# EAGLE board schema (EAGLE 6.5.0)
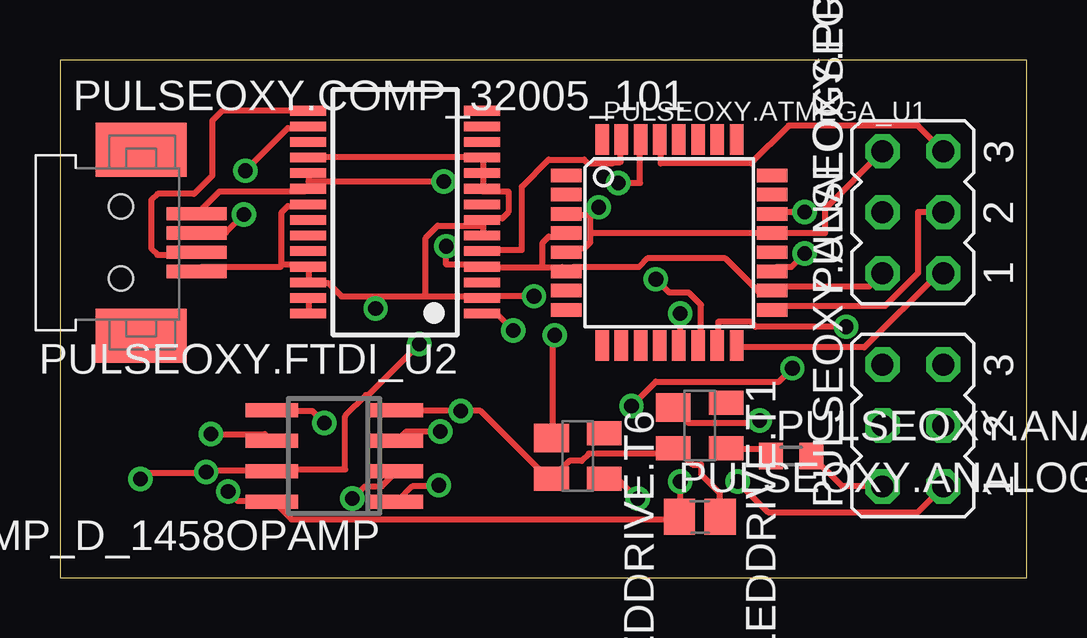
[diagram p0: board, top side]
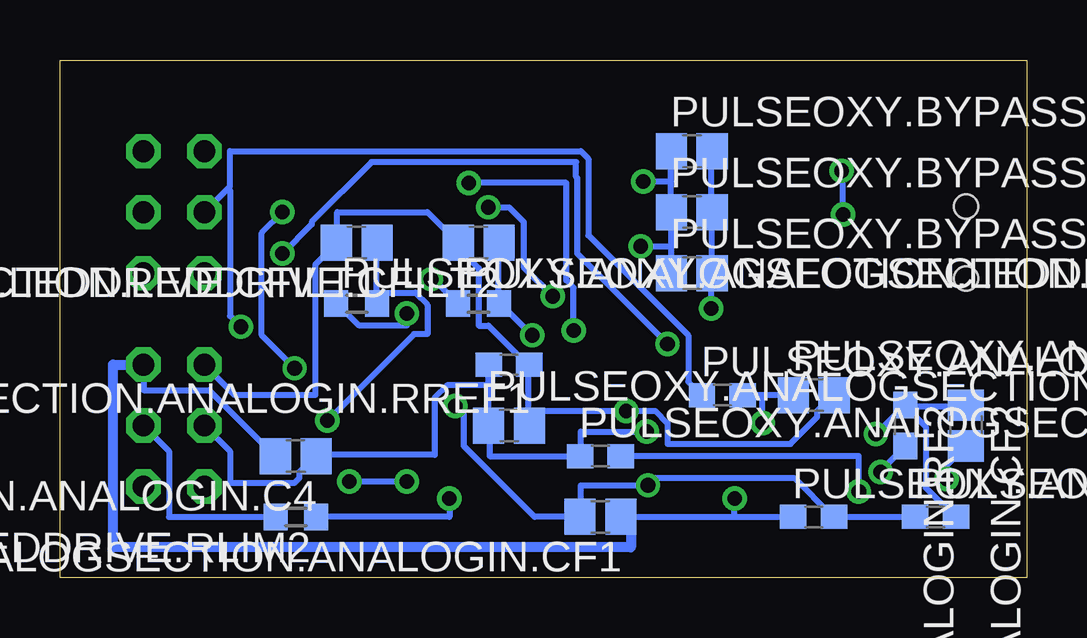
[diagram p1: board, bottom side, seen from below]

Size 40.31 x 21.58 mm. Coordinates in mm from the lower left corner, seen from the top.
Outline: 0,0 40.31,0 40.31,21.58 0,21.58 0,0
Copper layers (1*16): Top 0.035mm / dielectric 1.5mm / Bottom 0.035mm
Design rules "default": minimum track width 10mil, minimum drill 24mil, track to track 8mil, track to pad 8mil, pad to pad 8mil, via to via 8mil, smd to smd 8mil, copper to edge 40mil, drill to drill 8mil, minimum pad ring 10mil, minimum via ring 8mil, stop-mask expansion 4mil, vias tented up to drill 0mil, thermal gap 10mil

## Footprints (pad centres in the part's own frame; a part is rotated, then mirrored left to right if it is on the bottom)
C0805 = smd 1.3 x 1.5: 1 -0.85,0; 2 0.85,0
SO08 = smd 0.6 x 2.2: 1 -1.905,-2.6; 2 -0.635,-2.6; 3 0.635,-2.6; 4 1.905,-2.6; 5 1.905,2.6; 6 0.635,2.6; 7 -0.635,2.6; 8 -1.905,2.6
C0603 = smd 1.1 x 1: 1 -0.85,0; 2 0.85,0
R0603 = smd 1 x 1.1: 1 -0.85,0; 2 0.85,0
SOT143 = smd 1.2 x 1.44: 1 -0.75,-1.1 | smd 1 x 1.44: 2 0.95,-1.1; 3 0.95,1.1; 4 -0.95,1.1
JP3Q = drill 0.914 octagon: 1 -2.54,-1.27; 2 -2.54,1.27; 3 0,-1.27; 4 0,1.27; 5 2.54,-1.27; 6 2.54,1.27
TQFP32-08 = smd 1.27 x 0.559: 1 -4.293,2.8; 2 -4.293,2; 3 -4.293,1.2; 4 -4.293,0.4; 5 -4.293,-0.4; 6 -4.293,-1.2; 7 -4.293,-2; 8 -4.293,-2.8; 17 4.293,-2.8; 18 4.293,-2; 19 4.293,-1.2; 20 4.293,-0.4; 21 4.293,0.4; 22 4.293,1.2; 23 4.293,2; 24 4.293,2.8 | smd 0.559 x 1.27: 9 -2.8,-4.293; 10 -2,-4.293; 11 -1.2,-4.293; 12 -0.4,-4.293; 13 0.4,-4.293; 14 1.2,-4.293; 15 2,-4.293; 16 2.8,-4.293; 25 2.8,4.293; 26 2,4.293; 27 1.2,4.293; 28 0.4,4.293; 29 -0.4,4.293; 30 -1.2,4.293; 31 -2,4.293; 32 -2.8,4.293
32005-101 = smd 2.5 x 0.55: 1 3.15,1.2; 2 3.15,0.4; 3 3.15,-0.4; 4 3.15,-1.2 | smd 3.8 x 2.25: M1 0.85,3.875; M2 0.85,-3.875 | hole 1: 0,1.5; 0,-1.5
SSOP28 = smd 0.4 x 1.5: 1 -4.225,-3.625; 2 -3.575,-3.625; 3 -2.925,-3.625; 4 -2.275,-3.625; 5 -1.625,-3.625; 6 -0.975,-3.625; 7 -0.325,-3.625; 8 0.325,-3.625; 9 0.975,-3.625; 10 1.625,-3.625; 11 2.275,-3.625; 12 2.925,-3.625; 13 3.575,-3.625; 14 4.225,-3.625; 15 4.225,3.625; 16 3.575,3.625; 17 2.925,3.625; 18 2.275,3.625; 19 1.625,3.625; 20 0.975,3.625; 21 0.325,3.625; 22 -0.325,3.625; 23 -0.975,3.625; 24 -1.625,3.625; 25 -2.275,3.625; 26 -2.925,3.625; 27 -3.575,3.625; 28 -4.225,3.625

## Placement (x,y rotation side)
PULSEOXY.ANALOGSECTION.ANALOGIN.C2  [C0805]  8.89,7.62 0 bottom
PULSEOXY.ANALOGSECTION.ANALOGIN.C4  [C0805]  30.48,5.08 180 bottom
PULSEOXY.ANALOGSECTION.ANALOGIN.CBP1  [C0805]  26.67,2.54 0 top
PULSEOXY.ANALOGSECTION.ANALOGIN.CF1  [C0805]  17.78,2.54 180 bottom
PULSEOXY.ANALOGSECTION.ANALOGIN.CF2  [C0805]  2.54,6.35 270 bottom
PULSEOXY.ANALOGSECTION.ANALOGIN.COMP_D_1458OPAMP  LM1458D  [SO08]  11.43,5.08 90 top
PULSEOXY.ANALOGSECTION.ANALOGIN.CREF  [C0805]  21.59,6.35 0 bottom
PULSEOXY.ANALOGSECTION.ANALOGIN.R11  [C0603]  12.7,7.62 0 bottom
PULSEOXY.ANALOGSECTION.ANALOGIN.RF1  [C0603]  8.89,2.54 0 bottom
PULSEOXY.ANALOGSECTION.ANALOGIN.RF2  [C0603]  5.08,6.35 270 bottom
PULSEOXY.ANALOGSECTION.ANALOGIN.RI2  [C0603]  3.81,2.54 0 bottom
PULSEOXY.ANALOGSECTION.ANALOGIN.RREF1  [C0603]  21.59,8.89 180 bottom
PULSEOXY.ANALOGSECTION.ANALOGIN.RREF2  [C0603]  17.78,5.08 0 bottom
PULSEOXY.ANALOGSECTION.LEDDRIVE.CFILT1  [C0805]  27.94,13.97 180 bottom
PULSEOXY.ANALOGSECTION.LEDDRIVE.CFILT2  [C0805]  22.86,13.97 180 bottom
PULSEOXY.ANALOGSECTION.LEDDRIVE.RDRIVE1  [R0603]  27.94,11.43 0 bottom
PULSEOXY.ANALOGSECTION.LEDDRIVE.RDRIVE2  [R0603]  22.86,11.43 0 bottom
PULSEOXY.ANALOGSECTION.LEDDRIVE.RLIM1  [R0603]  30.48,5.08 0 top
PULSEOXY.ANALOGSECTION.LEDDRIVE.RLIM2  [R0603]  30.48,2.54 180 bottom
PULSEOXY.ANALOGSECTION.LEDDRIVE.T1  [SOT143]  26.67,6.35 270 top
PULSEOXY.ANALOGSECTION.LEDDRIVE.T6  [SOT143]  21.59,5.08 270 top
PULSEOXY.ANALOGSECTION.SENSORHEADER  [JP3Q]  35.56,6.35 90 top
PULSEOXY.ATMEGA_U1  MEGA48/88/168-AU  [TQFP32-08]  25.4,13.97 0 top
PULSEOXY.BYPASS.BP1  [C0805]  13.97,12.7 0 bottom
PULSEOXY.BYPASS.BP2  [C0805]  13.97,15.24 0 bottom
PULSEOXY.BYPASS.BP3  [C0805]  13.97,17.78 0 bottom
PULSEOXY.COMP_32005_101  MINI-USB_4P-32005-101  [32005-101]  2.54,13.97 0 top
PULSEOXY.FTDI_U2  FT232RL  [SSOP28]  13.97,15.24 90 top
PULSEOXY.PROGRPORT  [JP3Q]  35.56,15.24 90 top

## Library data of the parts
PULSEOXY.ANALOGSECTION.ANALOGIN.C2 PULSEOXY.ANALOGSECTION.ANALOGIN.C4 PULSEOXY.ANALOGSECTION.ANALOGIN.CBP1 PULSEOXY.ANALOGSECTION.ANALOGIN.CF1 PULSEOXY.ANALOGSECTION.ANALOGIN.CF2 PULSEOXY.ANALOGSECTION.ANALOGIN.CREF PULSEOXY.ANALOGSECTION.ANALOGIN.R11 PULSEOXY.ANALOGSECTION.ANALOGIN.RF1 PULSEOXY.ANALOGSECTION.ANALOGIN.RF2 PULSEOXY.ANALOGSECTION.ANALOGIN.RI2 PULSEOXY.ANALOGSECTION.ANALOGIN.RREF1 PULSEOXY.ANALOGSECTION.ANALOGIN.RREF2 PULSEOXY.ANALOGSECTION.LEDDRIVE.CFILT1 PULSEOXY.ANALOGSECTION.LEDDRIVE.CFILT2 PULSEOXY.BYPASS.BP1-PULSEOXY.BYPASS.BP3 = resistor
PULSEOXY.ANALOGSECTION.ANALOGIN.COMP_D_1458OPAMP = linear
PULSEOXY.ANALOGSECTION.LEDDRIVE.RDRIVE1 PULSEOXY.ANALOGSECTION.LEDDRIVE.RDRIVE2 PULSEOXY.ANALOGSECTION.LEDDRIVE.RLIM1 PULSEOXY.ANALOGSECTION.LEDDRIVE.RLIM2 = rcl
PULSEOXY.ANALOGSECTION.LEDDRIVE.T1 PULSEOXY.ANALOGSECTION.LEDDRIVE.T6 = semicon-smd-ipc
PULSEOXY.ANALOGSECTION.SENSORHEADER PULSEOXY.PROGRPORT = jumper
PULSEOXY.ATMEGA_U1 = avr-4
PULSEOXY.COMP_32005_101 = con-cypressindustries; OC_FARNELL: unknown; OC_NEWARK: unknown
PULSEOXY.FTDI_U2 = ftdichip; MPN: FT232RL; OC_FARNELL: 1146032; OC_NEWARK: 91K9918

## Nets
N$0: PULSEOXY.ANALOGSECTION.ANALOGIN.C2.2 PULSEOXY.ANALOGSECTION.ANALOGIN.CBP1.2 PULSEOXY.ANALOGSECTION.ANALOGIN.COMP_D_1458OPAMP.4 PULSEOXY.ANALOGSECTION.ANALOGIN.CREF.2 PULSEOXY.ANALOGSECTION.ANALOGIN.RREF1.1 PULSEOXY.ANALOGSECTION.LEDDRIVE.CFILT1.2 PULSEOXY.ANALOGSECTION.LEDDRIVE.CFILT2.2 PULSEOXY.ANALOGSECTION.LEDDRIVE.T1.2 PULSEOXY.ANALOGSECTION.LEDDRIVE.T6.2 PULSEOXY.ANALOGSECTION.SENSORHEADER.6
N$1: PULSEOXY.ANALOGSECTION.ANALOGIN.C2.1 PULSEOXY.ANALOGSECTION.ANALOGIN.COMP_D_1458OPAMP.5 PULSEOXY.ANALOGSECTION.ANALOGIN.R11.2
N$2: PULSEOXY.ANALOGSECTION.ANALOGIN.C4.2 PULSEOXY.ANALOGSECTION.ANALOGIN.CF1.1 PULSEOXY.ANALOGSECTION.ANALOGIN.COMP_D_1458OPAMP.2 PULSEOXY.ANALOGSECTION.ANALOGIN.RF1.1 PULSEOXY.ANALOGSECTION.SENSORHEADER.5
N$3: PULSEOXY.ANALOGSECTION.ANALOGIN.C4.1 PULSEOXY.ANALOGSECTION.ANALOGIN.COMP_D_1458OPAMP.3 PULSEOXY.ANALOGSECTION.ANALOGIN.CREF.1 PULSEOXY.ANALOGSECTION.ANALOGIN.RREF1.2 PULSEOXY.ANALOGSECTION.ANALOGIN.RREF2.1 PULSEOXY.ANALOGSECTION.SENSORHEADER.4
N$4: PULSEOXY.ANALOGSECTION.ANALOGIN.CBP1.1 PULSEOXY.ANALOGSECTION.ANALOGIN.COMP_D_1458OPAMP.8 PULSEOXY.ANALOGSECTION.ANALOGIN.RREF2.2 PULSEOXY.ANALOGSECTION.SENSORHEADER.1
N$5: PULSEOXY.ANALOGSECTION.ANALOGIN.CF1.2 PULSEOXY.ANALOGSECTION.ANALOGIN.COMP_D_1458OPAMP.1 PULSEOXY.ANALOGSECTION.ANALOGIN.RF1.2 PULSEOXY.ANALOGSECTION.ANALOGIN.RI2.1 PULSEOXY.ATMEGA_U1.22
N$6: PULSEOXY.ANALOGSECTION.ANALOGIN.CF2.2 PULSEOXY.ANALOGSECTION.ANALOGIN.COMP_D_1458OPAMP.7 PULSEOXY.ANALOGSECTION.ANALOGIN.RF2.2 PULSEOXY.ATMEGA_U1.19
N$7: PULSEOXY.ANALOGSECTION.ANALOGIN.CF2.1 PULSEOXY.ANALOGSECTION.ANALOGIN.COMP_D_1458OPAMP.6 PULSEOXY.ANALOGSECTION.ANALOGIN.RF2.1 PULSEOXY.ANALOGSECTION.ANALOGIN.RI2.2
N$8: PULSEOXY.ANALOGSECTION.ANALOGIN.R11.1 PULSEOXY.ATMEGA_U1.15 PULSEOXY.PROGRPORT.4
N$9: PULSEOXY.ANALOGSECTION.LEDDRIVE.CFILT1.1 PULSEOXY.ANALOGSECTION.LEDDRIVE.RDRIVE1.2 PULSEOXY.ANALOGSECTION.LEDDRIVE.T1.1
N$10: PULSEOXY.ANALOGSECTION.LEDDRIVE.CFILT2.1 PULSEOXY.ANALOGSECTION.LEDDRIVE.RDRIVE2.2 PULSEOXY.ANALOGSECTION.LEDDRIVE.T6.1
N$11: PULSEOXY.ANALOGSECTION.LEDDRIVE.RDRIVE1.1 PULSEOXY.ATMEGA_U1.13
N$12: PULSEOXY.ANALOGSECTION.LEDDRIVE.RDRIVE2.1 PULSEOXY.ATMEGA_U1.14
N$13: PULSEOXY.ANALOGSECTION.LEDDRIVE.RLIM1.2 PULSEOXY.ANALOGSECTION.SENSORHEADER.2
N$14: PULSEOXY.ANALOGSECTION.LEDDRIVE.RLIM1.1 PULSEOXY.ANALOGSECTION.LEDDRIVE.T1.3
N$15: PULSEOXY.ANALOGSECTION.LEDDRIVE.RLIM2.1 PULSEOXY.ANALOGSECTION.LEDDRIVE.T6.3
N$16: PULSEOXY.ANALOGSECTION.LEDDRIVE.RLIM2.2 PULSEOXY.ANALOGSECTION.SENSORHEADER.3
N$17: PULSEOXY.ATMEGA_U1.4 PULSEOXY.ATMEGA_U1.6 PULSEOXY.ATMEGA_U1.18 PULSEOXY.BYPASS.BP1.1 PULSEOXY.BYPASS.BP2.1 PULSEOXY.BYPASS.BP3.1 PULSEOXY.COMP_32005_101.1 PULSEOXY.FTDI_U2.4 PULSEOXY.FTDI_U2.19 PULSEOXY.FTDI_U2.20 PULSEOXY.PROGRPORT.2
N$18: PULSEOXY.ATMEGA_U1.3 PULSEOXY.ATMEGA_U1.5 PULSEOXY.ATMEGA_U1.21 PULSEOXY.BYPASS.BP1.2 PULSEOXY.BYPASS.BP2.2 PULSEOXY.BYPASS.BP3.2 PULSEOXY.COMP_32005_101.4 PULSEOXY.FTDI_U2.2 PULSEOXY.FTDI_U2.6 PULSEOXY.FTDI_U2.7 PULSEOXY.FTDI_U2.9 PULSEOXY.FTDI_U2.10 PULSEOXY.FTDI_U2.11 PULSEOXY.FTDI_U2.18 PULSEOXY.FTDI_U2.21 PULSEOXY.FTDI_U2.25 PULSEOXY.FTDI_U2.26 PULSEOXY.PROGRPORT.6
N$19: PULSEOXY.ATMEGA_U1.30 PULSEOXY.FTDI_U2.1
N$20: PULSEOXY.ATMEGA_U1.31 PULSEOXY.FTDI_U2.5
N$21: PULSEOXY.ATMEGA_U1.29 PULSEOXY.PROGRPORT.5
N$22: PULSEOXY.ATMEGA_U1.16 PULSEOXY.PROGRPORT.1
N$23: PULSEOXY.ATMEGA_U1.17 PULSEOXY.PROGRPORT.3
N$24: PULSEOXY.COMP_32005_101.3 PULSEOXY.FTDI_U2.15
N$25: PULSEOXY.COMP_32005_101.2 PULSEOXY.FTDI_U2.16
N$26: PULSEOXY.FTDI_U2.27 PULSEOXY.FTDI_U2.28

## Tracks (layer width: path | path; a pad name or v marks a point on that pad's centre or on a via)
N$0  (via drill 0.61)
  Top 0.254: PULSEOXY.ANALOGSECTION.ANALOGIN.CBP1.2 27.48,2.54 27.48,3.56 26.72,4.32 26.72,4.72 26.36,4.72 25.76,5.33 25.65,5.33 PULSEOXY.ANALOGSECTION.LEDDRIVE.T1.2 25.55,5.38 25.35,5.18 22.05,5.18 21.74,4.88 21.23,4.88 20.52,4.17 PULSEOXY.ANALOGSECTION.LEDDRIVE.T6.2 20.37,4.17 20.32,4.17 17.53,6.96 v16.71,6.96 14.07,6.96 PULSEOXY.ANALOGSECTION.ANALOGIN.COMP_D_1458OPAMP.4
  Bottom 0.254: PULSEOXY.ANALOGSECTION.ANALOGIN.C2.2 8.08,7.62 8.74,6.96 8.74,6.71 9.86,5.59 14.99,5.59 14.99,6.45 15.49,6.96 v16.71,6.96 20.68,6.96 PULSEOXY.ANALOGSECTION.ANALOGIN.CREF.2 20.78,6.35 20.78,8.89 PULSEOXY.ANALOGSECTION.ANALOGIN.RREF1.1 20.88,8.94 22.45,10.52 22.86,10.52 22.86,12.9 23.67,13.72 23.67,13.87 PULSEOXY.ANALOGSECTION.LEDDRIVE.CFILT2.2 23.72,13.97 24.99,15.24 28.75,15.24 28.75,13.97 PULSEOXY.ANALOGSECTION.LEDDRIVE.CFILT1.2 28.85,13.87 29.67,13.06 29.67,7.62 33.02,7.62 PULSEOXY.ANALOGSECTION.SENSORHEADER.6
N$1  (via drill 0.61)
  Top 0.254: v11.02,6.45 10.52,6.96 8.84,6.96 PULSEOXY.ANALOGSECTION.ANALOGIN.COMP_D_1458OPAMP.5
  Bottom 0.254: PULSEOXY.ANALOGSECTION.ANALOGIN.C2.1 11.02,7.62 | 11.02,7.62 PULSEOXY.ANALOGSECTION.ANALOGIN.R11.2 | v11.02,6.45 11.02,7.62
N$2  (via drill 0.61)
  Top 0.254: v12.19,3.3 12.7,3.81 13.41,3.81 14.02,4.42 PULSEOXY.ANALOGSECTION.ANALOGIN.COMP_D_1458OPAMP.2
  Bottom 0.254: PULSEOXY.ANALOGSECTION.SENSORHEADER.5 36.83,7.82 34.09,7.82 31.34,5.08 PULSEOXY.ANALOGSECTION.ANALOGIN.C4.2 | PULSEOXY.ANALOGSECTION.ANALOGIN.CF1.1 16.51,2.54 12.19,2.54 | 12.19,2.54 PULSEOXY.ANALOGSECTION.ANALOGIN.RF1.1 | 12.19,2.54 v12.19,3.3
  Bottom 0.406: 16.51,2.54 16.51,1.27 38.1,1.27 38.1,8.89 PULSEOXY.ANALOGSECTION.SENSORHEADER.5
N$3  (via drill 0.61)
  Top 0.254: v15.85,6.1 14.43,6.1 14.07,5.74 PULSEOXY.ANALOGSECTION.ANALOGIN.COMP_D_1458OPAMP.3
  Bottom 0.254: PULSEOXY.ANALOGSECTION.SENSORHEADER.4 33.22,5.28 33.22,3.96 30.53,3.96 30.33,4.17 30.33,4.42 29.67,5.08 PULSEOXY.ANALOGSECTION.ANALOGIN.C4.1 29.52,5.13 24.69,5.13 24.69,7.52 24.18,8.03 22.45,8.03 | 22.45,8.03 22.45,6.45 PULSEOXY.ANALOGSECTION.ANALOGIN.CREF.1 22.4,6.35 22.4,5.08 PULSEOXY.ANALOGSECTION.ANALOGIN.RREF2.1 18.59,5.18 18.59,6.1 v15.85,6.1 | 22.45,8.03 22.45,8.89 PULSEOXY.ANALOGSECTION.ANALOGIN.RREF1.2
N$4  (via drill 0.61)
  Top 0.254: v7.01,3.61 7.42,3.2 8.79,3.2 PULSEOXY.ANALOGSECTION.ANALOGIN.COMP_D_1458OPAMP.8 8.94,3.15 9.65,2.44 25.7,2.44 25.81,2.54 PULSEOXY.ANALOGSECTION.ANALOGIN.CBP1.1 25.86,2.64 v25.86,4.01 | PULSEOXY.ANALOGSECTION.SENSORHEADER.1 35.76,2.74 29.52,2.74 v28.25,4.01
  Bottom 0.254: PULSEOXY.ANALOGSECTION.ANALOGIN.RREF2.2 7.01,5.08 v7.01,3.61 | v25.86,4.01 v28.25,4.01
N$5  (via drill 0.61)
  Top 0.254: v31.04,15.24 29.77,15.24 29.72,15.19 PULSEOXY.ATMEGA_U1.22 | v30.53,8.74 29.97,8.18 24.84,8.18 v23.82,7.16 | v15.8,3.86 15.75,3.81 14.68,3.81 14.07,3.2 PULSEOXY.ANALOGSECTION.ANALOGIN.COMP_D_1458OPAMP.1
  Bottom 0.254: PULSEOXY.ANALOGSECTION.ANALOGIN.RI2.1 PULSEOXY.ANALOGSECTION.ANALOGIN.RF1.2 8.13,2.59 9.7,4.17 15.75,4.17 15.75,3.96 v15.8,3.86 18.59,3.86 18.59,2.64 PULSEOXY.ANALOGSECTION.ANALOGIN.CF1.2 20.52,2.54 23.47,5.49 23.47,6.81 v23.82,7.16 | v31.04,15.24 31.9,14.38 31.9,10.11 v30.53,8.74
N$6  (via drill 0.61)
  Top 0.254: v31.04,13.51 30.48,12.95 29.87,12.95 29.72,12.8 PULSEOXY.ATMEGA_U1.19 | v14.99,9.75 12.85,7.62 12.75,7.62 11.89,6.76 11.89,4.52 8.94,4.52 PULSEOXY.ANALOGSECTION.ANALOGIN.COMP_D_1458OPAMP.7 8.79,4.47 6.15,4.47 v6.1,4.42 5.99,4.37 3.61,4.37 v3.35,4.12
  Bottom 0.254: v6.1,4.42 6.1,4.47 5.08,5.49 PULSEOXY.ANALOGSECTION.ANALOGIN.RF2.2 | v31.04,13.51 29.82,14.73 29.82,14.83 27.33,17.32 18.8,17.32 18.8,16.71 18.75,16.66 18.75,13.51 v14.99,9.75 | v3.35,4.12 3.35,4.67 2.54,5.49 PULSEOXY.ANALOGSECTION.ANALOGIN.CF2.2
N$7  (via drill 0.61)
  Top 0.254: v6.3,5.99 8.53,5.99 8.79,5.74 PULSEOXY.ANALOGSECTION.ANALOGIN.COMP_D_1458OPAMP.6
  Bottom 0.254: PULSEOXY.ANALOGSECTION.ANALOGIN.RI2.2 3,2.54 4.22,3.76 4.22,6.3 5.08,7.16 PULSEOXY.ANALOGSECTION.ANALOGIN.RF2.1 | PULSEOXY.ANALOGSECTION.ANALOGIN.CF2.1 2.54,7.16 4.93,7.16 PULSEOXY.ANALOGSECTION.ANALOGIN.RF2.1 | v6.3,5.99 5.18,7.11 PULSEOXY.ANALOGSECTION.ANALOGIN.RF2.1
N$8  (via drill 0.61)
  Top 0.254: v32.77,10.46 29.01,10.46 28.8,10.67 27.43,10.67 27.43,9.7 PULSEOXY.ATMEGA_U1.15
  Bottom 0.254: PULSEOXY.PROGRPORT.4 33.3,16.23 | 33.3,16.23 33.22,16.31 33.22,17.78 18.59,17.78 18.29,17.47 18.29,14.28 14.12,10.11 14.12,8.18 13.56,7.62 PULSEOXY.ANALOGSECTION.ANALOGIN.R11.1 | v32.77,10.46 33.22,10.92 33.22,16.15 33.3,16.23
N$9  (via drill 0.61)
  Top 0.254: v29.16,6.55 29.06,6.45 26.21,6.45 25.6,7.06 PULSEOXY.ANALOGSECTION.LEDDRIVE.T1.1
  Bottom 0.254: PULSEOXY.ANALOGSECTION.LEDDRIVE.CFILT1.1 27.13,13.97 27.13,11.43 PULSEOXY.ANALOGSECTION.LEDDRIVE.RDRIVE1.2 27.03,11.89 25.5,11.89 24.99,11.38 24.99,10.16 25.55,10.16 v29.16,6.55
N$10  (via drill 0.61)
  Top 0.254: v20.62,10.11 20.52,10.11 20.52,5.84 PULSEOXY.ANALOGSECTION.LEDDRIVE.T6.1
  Bottom 0.254: PULSEOXY.ANALOGSECTION.LEDDRIVE.CFILT2.1 22.05,13.97 22.05,11.43 PULSEOXY.ANALOGSECTION.LEDDRIVE.RDRIVE2.2 21.89,11.38 v20.62,10.11
N$11  (via drill 0.61)
  Top 0.254: v25.86,11.02 25.86,9.7 25.81,9.7 PULSEOXY.ATMEGA_U1.13
  Bottom 0.254: v25.86,11.02 25.86,10.52 27.84,10.52 28.75,11.43 PULSEOXY.ANALOGSECTION.LEDDRIVE.RDRIVE1.1
N$12  (via drill 0.61)
  Top 0.254: v24.84,12.45 25.4,11.89 26.21,11.89 26.72,11.38 26.72,9.7 26.62,9.7 PULSEOXY.ATMEGA_U1.14
  Bottom 0.254: v24.84,12.45 24.74,12.45 23.72,11.43 PULSEOXY.ANALOGSECTION.LEDDRIVE.RDRIVE2.1
N$13
  Top 0.254: PULSEOXY.ANALOGSECTION.SENSORHEADER.2 32.61,3.81 31.34,5.08 PULSEOXY.ANALOGSECTION.LEDDRIVE.RLIM1.2
N$14
  Top 0.254: PULSEOXY.ANALOGSECTION.LEDDRIVE.RLIM1.1 29.62,5.08 29.31,5.38 27.79,5.38 PULSEOXY.ANALOGSECTION.LEDDRIVE.T1.3
N$15  (via drill 0.61)
  Top 0.254: v24.08,3.3 23.27,4.12 22.71,4.12 PULSEOXY.ANALOGSECTION.LEDDRIVE.T6.3
  Bottom 0.254: PULSEOXY.ANALOGSECTION.LEDDRIVE.RLIM2.1 24.08,2.54 v24.08,3.3
N$16
  Bottom 0.254: PULSEOXY.ANALOGSECTION.LEDDRIVE.RLIM2.2 35.76,2.54 35.76,5.28 PULSEOXY.ANALOGSECTION.SENSORHEADER.3
N$17  (via drill 0.61)
  Top 0.254: 10.36,16.51 10.36,16.82 PULSEOXY.FTDI_U2.19 | 10.36,16.51 10.36,16.26 PULSEOXY.FTDI_U2.20 10.26,16.15 10.21,16.1 6.65,16.1 5.74,15.19 PULSEOXY.COMP_32005_101.1 | 20.12,12.95 17.63,12.95 PULSEOXY.FTDI_U2.4 17.53,13.06 16.1,13.06 v16.1,13.82 | 20.12,12.95 20.93,12.95 21.08,12.8 PULSEOXY.ATMEGA_U1.6 21.23,12.8 21.39,12.95 24.13,12.95 24.49,13.31 27.74,13.31 29.11,11.94 29.57,11.94 PULSEOXY.ATMEGA_U1.18 29.72,11.99 29.87,12.14 33.73,12.14 PULSEOXY.PROGRPORT.2 | 20.12,12.95 20.12,13.97 20.37,14.22 20.98,14.22 21.08,14.33 PULSEOXY.ATMEGA_U1.4 | v16,16.51 10.36,16.51
  Bottom 0.254: 14.83,13.82 14.83,15.24 PULSEOXY.BYPASS.BP2.1 14.83,15.34 14.83,16.51 | 14.83,13.82 14.83,12.7 PULSEOXY.BYPASS.BP1.1 | 14.83,16.51 14.83,17.78 PULSEOXY.BYPASS.BP3.1 | v16.1,13.82 14.83,13.82 | 14.83,16.51 v16,16.51
N$18  (via drill 0.61)
  Top 0.254: 17.63,14.68 17.63,14.88 PULSEOXY.FTDI_U2.7 17.73,14.93 17.78,14.99 18.44,14.99 18.69,15.24 18.69,16.1 17.63,16.1 PULSEOXY.FTDI_U2.9 17.63,16.26 17.63,16.82 PULSEOXY.FTDI_U2.10 17.63,16.97 17.63,17.42 PULSEOXY.FTDI_U2.11 17.58,17.53 10.36,17.53 PULSEOXY.FTDI_U2.18 | 17.63,14.68 17.63,14.28 PULSEOXY.FTDI_U2.6 | 9.25,13.06 9.25,15.24 9.5,15.49 10.26,15.49 10.31,15.54 PULSEOXY.FTDI_U2.21 | 9.25,13.06 10.26,13.06 PULSEOXY.FTDI_U2.25 10.36,12.95 10.36,12.34 PULSEOXY.FTDI_U2.26 10.46,12.29 11.18,12.29 11.73,11.73 13.16,11.73 | 13.16,11.73 15.24,11.73 | 15.24,11.73 17.53,11.73 17.58,11.68 PULSEOXY.FTDI_U2.2 17.68,11.73 v19.76,11.73 | PULSEOXY.COMP_32005_101.4 5.74,12.8 5.89,12.95 9.2,12.95 9.25,13.06 | 13.16,11.73 v13.16,11.23 | 17.63,14.68 15.75,14.68 15.24,14.17 15.24,11.73 | 22.1,15.14 22.1,14.38 | 22.1,14.38 22.1,13.97 21.84,13.72 21.23,13.72 21.13,13.61 PULSEOXY.ATMEGA_U1.5 | 22.1,15.14 21.13,15.14 PULSEOXY.ATMEGA_U1.3 | 22.1,14.38 29.67,14.38 PULSEOXY.ATMEGA_U1.21 29.82,14.38 31.9,14.38 31.9,15.39 PULSEOXY.PROGRPORT.6 | v22.45,15.44 22.2,15.19 22.1,15.14
  Bottom 0.254: PULSEOXY.BYPASS.BP3.2 13.16,17.78 13.16,15.34 PULSEOXY.BYPASS.BP2.2 13.16,15.24 13.16,12.7 PULSEOXY.BYPASS.BP1.2 13.16,12.6 v13.16,11.23 | v19.76,11.73 20.98,12.95 20.98,14.83 21.59,15.44 v22.45,15.44
N$19  (via drill 0.61)
  Top 0.254: v23.27,16.46 24.18,16.46 24.18,18.24 PULSEOXY.ATMEGA_U1.30 | v18.9,10.31 18.24,10.97 17.63,10.97 PULSEOXY.FTDI_U2.1
  Bottom 0.254: v23.27,16.46 19.2,16.46 19.2,12.39 18.9,12.09 v18.9,10.31
N$20
  Top 0.254: PULSEOXY.ATMEGA_U1.31 23.37,18.24 23.37,17.32 23.06,17.32 23.01,17.27 22,17.27 21.84,17.42 20.37,17.42 19.25,16.31 19.25,13.66 17.63,13.66 PULSEOXY.FTDI_U2.5
N$21
  Top 0.254: PULSEOXY.PROGRPORT.5 35.76,18.85 30.38,18.85 28.8,17.27 25.04,17.27 25.04,18.24 PULSEOXY.ATMEGA_U1.29
N$22
  Top 0.254: PULSEOXY.PROGRPORT.1 36.63,12.7 33.53,9.6 28.3,9.6 28.25,9.65 PULSEOXY.ATMEGA_U1.16
N$23
  Top 0.254: PULSEOXY.PROGRPORT.3 35.76,15.24 35.76,12.7 34.39,11.33 29.87,11.33 29.72,11.18 PULSEOXY.ATMEGA_U1.17
N$24
  Top 0.254: PULSEOXY.FTDI_U2.15 6.77,19.46 6.35,19.05 6.35,16.76 5.59,16 4.06,16 3.81,15.75 3.81,13.72 4.06,13.46 5.58,13.46 PULSEOXY.COMP_32005_101.3
N$25  (via drill 0.61)
  Top 0.254: v7.72,16.97 9.5,18.75 10.26,18.75 10.31,18.8 PULSEOXY.FTDI_U2.16 | v7.67,15.14 6.91,14.38 5.74,14.38 PULSEOXY.COMP_32005_101.2
  Bottom 0.254: v7.72,16.97 7.67,16.92 v7.67,15.14
N$26
  Top 0.254: PULSEOXY.FTDI_U2.28 10.36,11.02 10.36,11.63 PULSEOXY.FTDI_U2.27